# EAGLE board relay-set-d-decode (EAGLE 7.7.0)
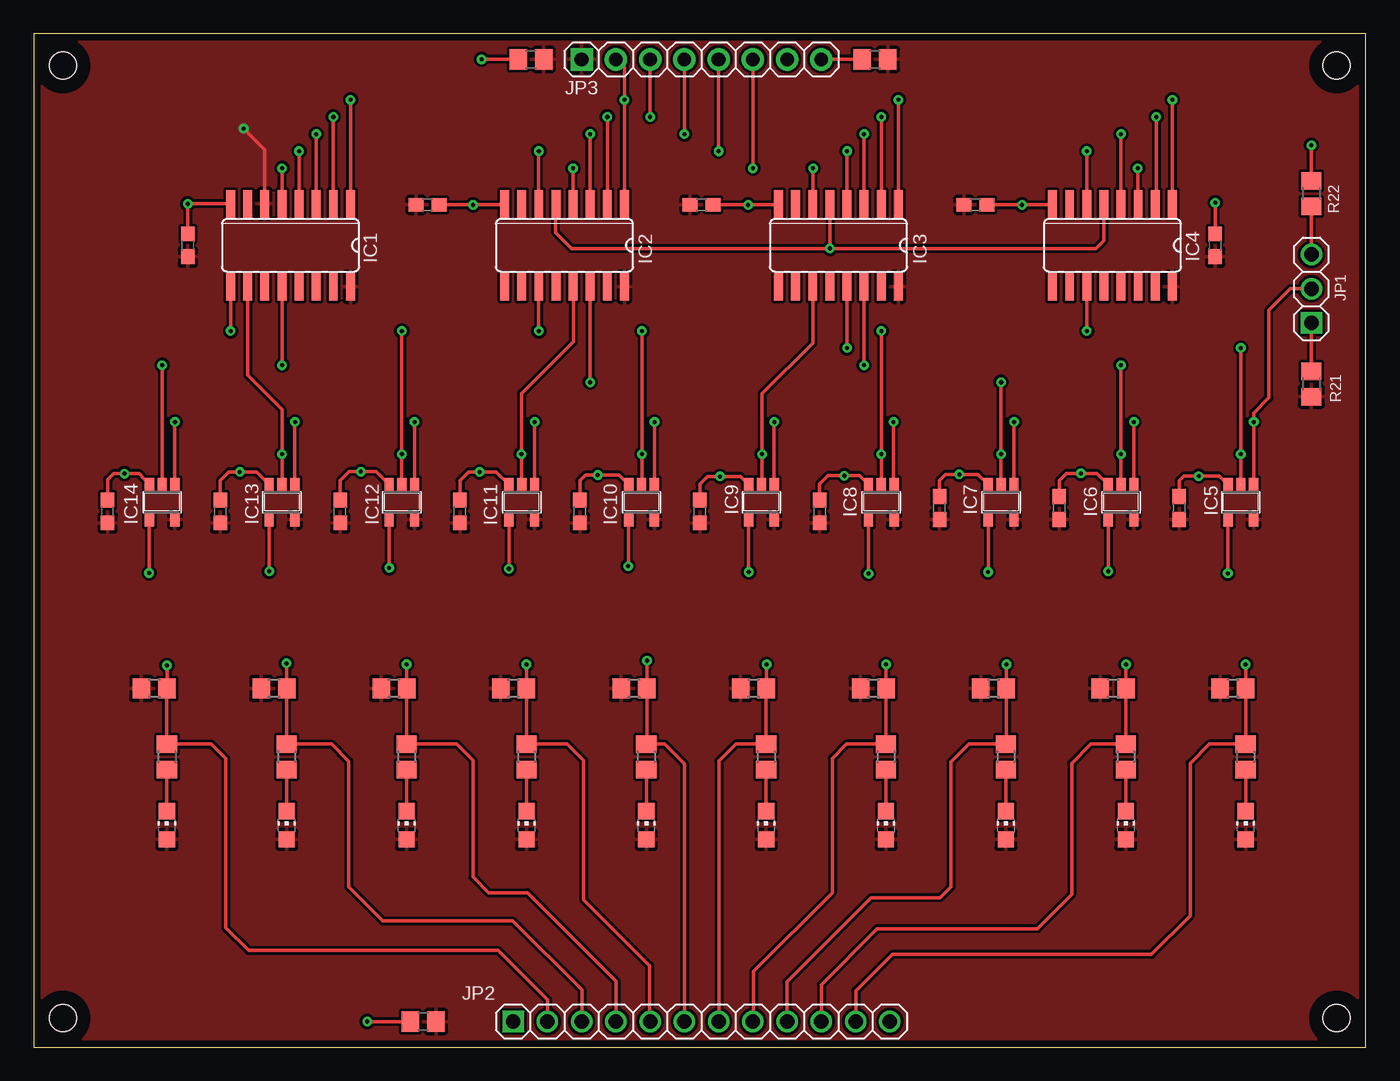
[diagram p0: board, top side]
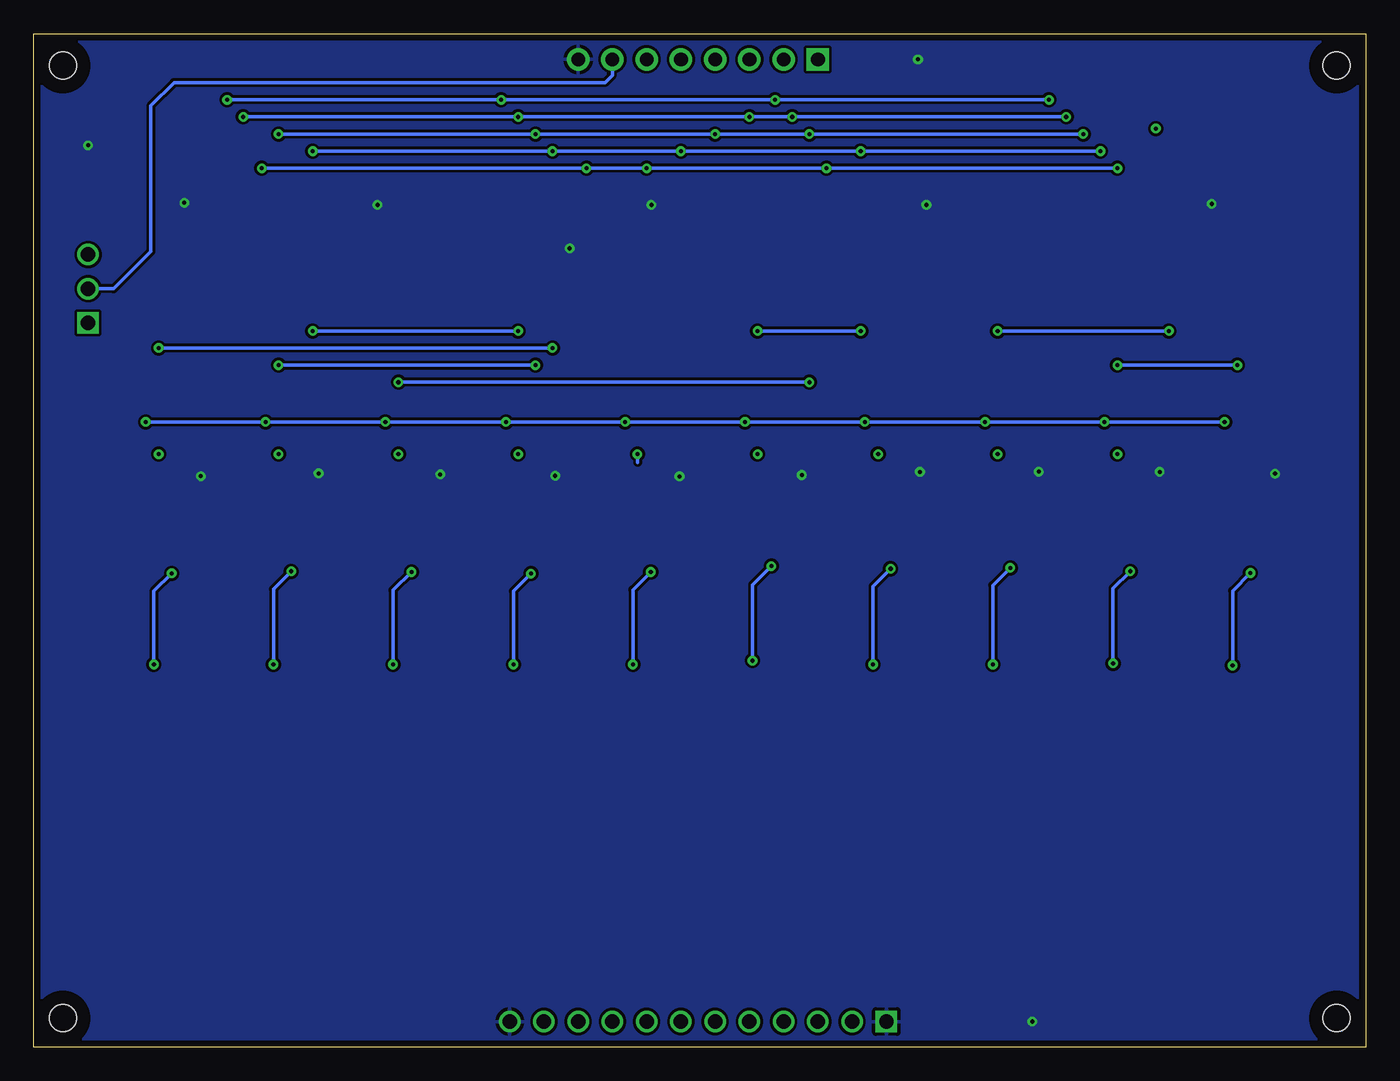
[diagram p1: board, bottom side, seen from below]

Size 98.81 x 75.18 mm. Coordinates in mm from the lower left corner, seen from the top.
Outline: 98.81,75.18 0,75.18 0,0 98.81,0 98.81,75.18
Copper layers (1*16): Top 0.035mm / dielectric 1.5mm / Bottom 0.035mm
Design rules "default *": minimum track width 8mil, minimum drill 12mil, track to track 8mil, track to pad 10mil, pad to pad 10mil, via to via 8mil, smd to smd 8mil, copper to edge 20mil, drill to drill 8mil, minimum pad ring 10mil, minimum via ring 8mil, stop-mask expansion 4mil, vias tented up to drill 0mil, thermal gap 10mil
Holes 2.01 mm at 2.16,2.16 96.65,2.16 96.65,72.82 2.16,72.82
tRestrict: area 94.6,0.2 to 98.7,4.2; area 94.6,70.8 to 98.7,74.8; area 0.2,70.8 to 4.2,74.8; area 0.2,0.2 to 4.2,4.2
bRestrict: area 94.6,0.2 to 98.7,4.2; area 94.6,70.8 to 98.7,74.8; area 0.2,70.8 to 4.2,74.8; area 0.2,0.2 to 4.2,4.2

## Footprints (pad centres in the part's own frame; a part is rotated, then mirrored left to right if it is on the bottom)
C0603 = smd 1.1 x 1: 1 -0.85,0; 2 0.85,0
C0805 = smd 1.3 x 1.5: 1 -0.95,0; 2 0.95,0
SO16 = smd 0.66 x 2.032: 1 -4.445,-3.073; 2 -3.175,-3.073; 3 -1.905,-3.073; 4 -0.635,-3.073; 5 0.635,-3.073; 6 1.905,-3.073; 7 3.175,-3.073; 8 4.445,-3.073; 9 4.445,3.073; 10 3.175,3.073; 11 1.905,3.073; 12 0.635,3.073; 13 -0.635,3.073; 14 -1.905,3.073; 15 -3.175,3.073; 16 -4.445,3.073
SOT23-5 = smd 0.69 x 0.99: 1 -0.95,-1.29; 2 0,-1.29; 3 0.95,-1.29; 4 0.95,1.3; 5 -0.95,1.3
1X03 = drill 1.067 square: 1 -2.54,0 | drill 1.067: 2 0,0; 3 2.54,0
1X12 = drill 1.067 square: 1 -13.97,0 | drill 1.067: 2 -11.43,0; 3 -8.89,0; 4 -6.35,0; 5 -3.81,0; 6 -1.27,0; 7 1.27,0; 8 3.81,0; 9 6.35,0; 10 8.89,0; 11 11.43,0; 12 13.97,0
1X08 = drill 1.016 pad 1.676 square: 1 -8.89,0 | drill 1.016 pad 1.676: 2 -6.35,0; 3 -3.81,0; 4 -1.27,0; 5 1.27,0; 6 3.81,0; 7 6.35,0; 8 8.89,0
CHIP-LED0805 = smd 1.2 x 1.2: A 0,-1.05; C 0,1.05
R0805 = smd 1.3 x 1.5: 1 -0.95,0; 2 0.95,0

## Placement (x,y rotation side)
C1  [C0603]  29.21,62.48 0 top
C2  [C0603]  87.63,59.49 90 top
C3  [C0603]  49.53,62.48 0 top
C4  [C0603]  69.85,62.48 0 top
C5  [C0805]  36.88,73.28 180 top
C6  [C0603]  49.4,39.75 90 top
C7  [C0805]  62.41,73.28 180 top
C8  [C0603]  58.29,39.75 90 top
C9  [C0805]  28.88,1.91 180 top
C10  [C0603]  67.18,40.01 90 top
C11  [C0603]  76.07,40.01 90 top
C12  [C0603]  5.49,39.75 90 top
C13  [C0603]  84.96,40.01 90 top
C14  [C0603]  13.84,39.75 90 top
C15  [C0603]  31.62,39.75 90 top
C16  [C0603]  22.73,39.75 90 top
C17  [C0603]  40.51,39.75 90 top
C18  [C0603]  11.43,59.49 90 top
IC1  74LS138D  [SO16]  19.05,59.49 180 top
IC2  74LS138D  [SO16]  39.37,59.49 180 top
IC3  74LS138D  [SO16]  59.69,59.49 180 top
IC4  74LS138D  [SO16]  80.01,59.49 180 top
IC5  74LVC1G125DBV  [SOT23-5]  89.53,40.44 180 top
IC6  74LVC1G125DBV  [SOT23-5]  80.64,40.44 180 top
IC7  74LVC1G125DBV  [SOT23-5]  71.75,40.44 180 top
IC8  74LVC1G125DBV  [SOT23-5]  62.87,40.44 180 top
IC9  74LVC1G125DBV  [SOT23-5]  53.98,40.44 180 top
IC10  74LVC1G125DBV  [SOT23-5]  45.09,40.44 180 top
IC11  74LVC1G125DBV  [SOT23-5]  36.2,40.44 180 top
IC12  74LVC1G125DBV  [SOT23-5]  27.3,40.44 180 top
IC13  74LVC1G125DBV  [SOT23-5]  18.41,40.44 180 top
IC14  74LVC1G125DBV  [SOT23-5]  9.53,40.44 180 top
JP1  [1X03]  94.77,56.26 90 top
JP2  [1X12]  49.53,1.91 0 top
JP3  [1X08]  49.53,73.28 0 top
LED1  [CHIP-LED0805]  89.89,16.46 0 top
LED2  [CHIP-LED0805]  81,16.46 0 top
LED3  [CHIP-LED0805]  72.11,16.46 0 top
LED4  [CHIP-LED0805]  63.22,16.46 0 top
LED5  [CHIP-LED0805]  54.33,16.46 0 top
LED6  [CHIP-LED0805]  45.44,16.46 0 top
LED7  [CHIP-LED0805]  36.55,16.46 0 top
LED8  [CHIP-LED0805]  27.66,16.46 0 top
LED9  [CHIP-LED0805]  18.77,16.46 0 top
LED10  [CHIP-LED0805]  9.88,16.46 0 top
R1  [R0805]  88.95,26.62 180 top
R2  [R0805]  80.06,26.62 180 top
R3  [R0805]  71.2,26.62 180 top
R4  [R0805]  62.28,26.62 180 top
R5  [R0805]  53.39,26.62 180 top
R6  [R0805]  44.53,26.62 180 top
R7  [R0805]  35.59,26.62 180 top
R8  [R0805]  26.72,26.62 180 top
R9  [R0805]  17.83,26.62 180 top
R10  [R0805]  8.94,26.62 180 top
R11  [R0805]  89.89,21.54 270 top
R12  [R0805]  81,21.54 270 top
R13  [R0805]  72.11,21.54 270 top
R14  [R0805]  63.22,21.54 270 top
R15  [R0805]  54.33,21.54 270 top
R16  [R0805]  45.44,21.54 270 top
R17  [R0805]  36.55,21.54 270 top
R18  [R0805]  27.66,21.54 270 top
R19  [R0805]  18.77,21.54 270 top
R20  [R0805]  9.88,21.54 270 top
R21  [R0805]  94.77,49.2 270 top
R22  [R0805]  94.77,63.32 270 top

## Library data of the parts
C1-C18 R1-R22 = resistor
IC1-IC4 = 74xx-us
IC5-IC14 = 74xx-little-us
JP1 JP3 = pinhead
JP2 = custom-pinhead
LED1-LED10 = led

## Nets
DA_IN: IC1.1 IC2.1 IC3.1 IC4.1 JP3.2
DB_IN: IC1.2 IC2.2 IC3.2 IC4.2 JP3.3
DC_IN: IC1.3 IC2.3 IC3.3 IC4.4 JP3.4
DD_IN: IC1.4 IC2.6 IC3.4 IC4.6 JP3.5
DE_IN: IC1.5 IC2.4 IC3.6 IC4.3 JP3.6
DSA-DSB: IC5.1 IC6.1 IC7.1 IC8.1 IC9.1 IC10.1 IC11.1 IC12.1 IC13.1 IC14.1 JP1.2 JP3.7
EIGHT: IC3.14 IC6.2
EIGHT_N: IC6.4 JP2.10 R2.1 R12.1
FIVE: IC3.11 IC9.2
FIVE_N: IC9.4 JP2.7 R5.1 R15.1
FOUR: IC2.11 IC10.2
FOUR_N: IC10.4 JP2.6 R6.1 R16.1
GND: C1.2 C2.2 C3.2 C4.2 C5.2 C6.2 C7.2 C8.2 C9.2 C10.2 C11.2 C12.2 C13.2 C14.2 C15.2 C16.2 C17.2 C18.2 IC1.8 IC2.5 IC2.8 IC3.5 IC3.8 IC4.5 IC4.8 IC5.3 IC6.3 IC7.3 IC8.3 IC9.3 IC10.3 IC11.3 IC12.3 IC13.3 IC14.3 JP2.1 JP2.12 JP3.8 R22.1
N$1: LED1.C R11.2
N$2: LED2.C R12.2
N$3: LED3.C R13.2
N$4: LED4.C R14.2
N$5: LED5.C R15.2
N$6: LED6.C R16.2
N$7: LED7.C R17.2
N$8: LED8.C R18.2
N$9: LED9.C R19.2
N$10: LED10.C R20.2
N$11: JP1.1 R21.1
N$13: JP1.3 R22.2
NINE: IC3.13 IC5.2
NINE_N: IC5.4 JP2.11 R1.1 R11.1
ONE: IC1.10 IC13.2
ONE_N: IC13.4 JP2.3 R9.1 R19.1
SEVEN: IC2.14 IC7.2
SEVEN_N: IC7.4 JP2.9 R3.1 R13.1
SIX: IC4.11 IC8.2
SIX_N: IC8.4 JP2.8 R4.1 R14.1
THREE: IC2.13 IC11.2
THREE_N: IC11.4 JP2.5 R7.1 R17.1
TWO: IC1.9 IC12.2
TWO_N: IC12.4 JP2.4 R8.1 R18.1
VCC: C1.1 C2.1 C3.1 C4.1 C5.1 C6.1 C7.1 C8.1 C9.1 C10.1 C11.1 C12.1 C13.1 C14.1 C15.1 C16.1 C17.1 C18.1 IC1.6 IC1.16 IC2.16 IC3.16 IC4.16 IC5.5 IC6.5 IC7.5 IC8.5 IC9.5 IC10.5 IC11.5 IC12.5 IC13.5 IC14.5 JP3.1 LED1.A LED2.A LED3.A LED4.A LED5.A LED6.A LED7.A LED8.A LED9.A LED10.A R1.2 R2.2 R3.2 R4.2 R5.2 R6.2 R7.2 R8.2 R9.2 R10.2 R21.2
ZERO: IC1.12 IC14.2
ZERO_N: IC14.4 JP2.2 R10.1 R20.1

## Tracks (layer width: path | path; a pad name or v marks a point on that pad's centre or on a via)
DA_IN  (via drill 0.3)
  Top 0.254: IC1.1 v23.5,70.28 | v84.45,70.28 IC4.1 | IC2.1 v43.81,70.28 43.81,72.64 JP3.2 | IC3.1 v64.14,70.28
  Bottom 0.254: v23.5,70.28 v43.81,70.28 v64.14,70.28 v84.45,70.28
DB_IN  (via drill 0.3)
  Top 0.254: IC1.2 v22.23,69.01 | v83.26,69.01 83.26,62.56 IC4.2 | IC2.2 v42.55,69.01 | IC3.2 v62.87,69.01 | JP3.3 v45.72,69.01
  Bottom 0.254: v22.23,69.01 v42.55,69.01 v45.72,69.01 v62.87,69.01 v83.26,69.01
DC_IN  (via drill 0.3)
  Top 0.254: IC1.3 v20.95,67.74 | IC3.3 v61.59,67.74 | JP3.4 v48.26,67.74 | IC4.4 v80.64,67.74 | IC2.3 v41.27,67.74
  Bottom 0.254: v20.95,67.74 v41.27,67.74 v48.26,67.74 v61.59,67.74 v80.64,67.74
DD_IN  (via drill 0.3)
  Top 0.254: IC1.4 v19.68,66.47 | IC2.6 v37.47,66.47 | JP3.5 v50.8,66.47 | IC4.6 v78.11,66.47 | IC3.4 v60.33,66.47
  Bottom 0.254: v19.68,66.47 v37.47,66.47 v50.8,66.47 v60.33,66.47 v78.11,66.47
DE_IN  (via drill 0.3)
  Top 0.254: IC1.5 v18.41,65.2 | IC2.4 v40.01,65.2 | IC3.6 57.78,65.18 v57.81,65.2 | JP3.6 v53.34,65.2 | IC4.3 81.89,62.59 v81.89,65.2
  Bottom 0.254: v18.41,65.2 v40.01,65.2 v53.34,65.2 v57.81,65.2 v81.89,65.2
DSA-DSB  (via drill 0.3)
  Top 0.254: IC14.1 v10.47,46.38 | 90.5,41.73 IC5.1 90.48,46.37 | IC13.1 19.36,46.38 v19.38,46.38 | IC12.1 28.25,46.38 v28.25,46.38 | IC11.1 37.15,46.38 v37.16,46.38 | IC10.1 46.03,46.37 v46.05,46.38 | IC9.1 54.92,46.37 v54.94,46.38 | IC8.1 63.78,41.76 v63.78,46.38 | IC7.1 72.7,46.38 v72.72,46.38 | IC6.1 81.59,46.38 v81.61,46.38 | 90.48,46.37 v90.5,46.38 | 90.48,46.37 90.48,47.05 91.62,48.18 91.62,54.69 93.19,56.26 JP1.2
  Bottom 0.254: v10.47,46.38 v19.38,46.38 v28.25,46.38 v37.16,46.38 v46.05,46.38 v54.94,46.38 v63.78,46.38 v72.72,46.38 v81.61,46.38 v90.5,46.38 | JP3.7 55.88,72.11 56.44,71.55 88.39,71.55 90.12,69.83 90.12,59.03 92.89,56.26 JP1.2
EIGHT  (via drill 0.3)
  Top 0.254: IC3.14 v61.59,50.6 | IC6.2 v80.64,43.99 v80.64,50.6
  Bottom 0.254: v80.64,50.6 v61.59,50.6
EIGHT_N  (via drill 0.3)
  Top 0.254: 81.54,22.5 R12.1 | IC6.4 79.69,35.32 v79.7,35.31 | v81.03,28.4 81.03,26.63 R2.1 R12.1 | R12.1 78.42,22.49 76.99,21.06 76.99,11.33 74.45,8.79 62.56,8.79 58.42,4.65 JP2.10
  Bottom 0.254: v79.7,35.31 81.03,33.98 v81.03,28.4
FIVE  (via drill 0.3)
  Top 0.254: IC9.2 54.03,41.78 v54.03,43.99 54.03,48.49 57.78,52.25 IC3.11 57.76,56.39
  Bottom 0.254: v54.03,43.99 54,43.38
FIVE_N  (via drill 0.3)
  Top 0.254: IC9.4 53.02,35.27 v53.03,35.26 | v54.36,28.4 54.36,26.63 R5.1 R15.1 52.08,22.49 50.83,21.23 50.83,1.93 JP2.7
  Bottom 0.254: v53.03,35.26 54.36,33.93 v54.36,28.4
FOUR  (via drill 0.3)
  Top 0.254: IC2.11 v37.47,53.14 | v45.11,53.14 v45.11,43.99 45.11,41.73 IC10.2
  Bottom 0.254: v37.47,53.14 v45.11,53.14
FOUR_N  (via drill 0.3)
  Top 0.254: v44.09,35.69 44.13,35.73 IC10.4 | v45.49,28.68 45.49,26.63 R6.1 45.48,22.52 R16.1 46.8,22.49 48.26,21.03 JP2.6
  Bottom 0.254: v44.09,35.69 45.49,34.29 v45.49,28.68
GND  (via drill 0.3, 0.3 pad 0.41)
  Top 0.254: IC13.3 16.52,42.67 v15.29,42.67 14.48,42.67 13.84,42.04 C14.2 | IC12.3 25.38,42.7 v24.26,42.7 23.39,42.7 22.73,42.04 C16.2 | IC14.3 7.83,42.55 v6.73,42.55 5.92,42.55 5.49,42.11 C12.2 | IC11.3 34.3,42.67 v33.07,42.67 32.26,42.67 31.62,42.04 C15.2 | IC10.3 43.42,42.44 v41.83,42.44 40.92,42.44 40.51,42.04 C17.2 | IC9.3 52.41,42.34 v50.9,42.34 49.96,42.34 49.4,41.78 C6.2 | IC8.3 61.25,42.39 v60.12,42.39 58.9,42.39 58.29,41.78 C8.2 | IC7.3 70.04,42.49 v68.66,42.49 67.64,42.49 67.18,42.04 C10.2 | IC6.3 78.85,42.57 v77.67,42.57 76.61,42.57 76.07,42.04 C11.2 | IC5.3 87.94,42.37 v86.41,42.37 85.29,42.37 84.96,42.04 C13.2 | IC4.5 79.38,59.84 78.79,59.26 v59.05,59.26 | v59.05,59.26 39.88,59.26 38.71,60.43 38.71,62.53 IC2.5 | IC3.5 v59.05,59.26 | IC1.8 v11.43,62.56 C18.2 | C1.2 v32.59,62.48 34.92,62.48 IC2.8 | C3.2 v52.98,62.48 55.24,62.48 IC3.8 | C4.2 v73.3,62.48 75.56,62.48 IC4.8 | C2.2 v87.63,62.64 | C5.2 v33.22,73.28 | C7.2 JP3.8 | C9.2 v24.74,1.91 | R22.1 v94.77,66.9
  Bottom 0.254: v68.66,42.49 68.56,42.6
  pour Bottom: 98.55,0.25 0.25,0.25 0.25,74.93 98.55,74.93
N$1
  Top 0.254: R11.2 LED1.C
N$2
  Top 0.254: R12.2 LED2.C
N$3
  Top 0.254: R13.2 LED3.C
N$4
  Top 0.254: R14.2 LED4.C
N$5
  Top 0.254: R15.2 LED5.C
N$6
  Top 0.254: R16.2 LED6.C
N$7
  Top 0.254: R17.2 LED7.C
N$8
  Top 0.254: R18.2 LED8.C
N$9
  Top 0.254: LED9.C R19.2
N$10
  Top 0.254: R20.2 LED10.C
N$11
  Top 0.254: JP1.1 R21.1
N$13
  Top 0.254: JP1.3 R22.2
NINE  (via drill 0.3)
  Top 0.254: IC3.13 v60.33,51.87 | v89.53,51.87 v89.53,43.99 IC5.2
  Bottom 0.254: v60.33,51.87 v89.53,51.87
NINE_N  (via drill 0.3)
  Top 0.254: IC5.4 88.58,35.17 v88.57,35.15 | v89.89,28.4 R1.1 R11.1 87.21,22.49 85.78,21.06 85.78,9.75 82.91,6.88 63.68,6.88 60.98,4.19 60.98,1.93 JP2.11
  Bottom 0.254: v88.57,35.15 89.89,33.83 v89.89,28.4
ONE  (via drill 0.3)
  Top 0.254: IC1.10 15.88,49.86 18.41,47.32 v18.41,43.99 IC13.2
ONE_N  (via drill 0.3 pad 0.41)
  Top 0.254: JP2.3 40.66,1.93 40.66,4.24 35.53,9.37 25.88,9.37 23.37,11.89 23.37,21.21 22.09,22.49 R19.1 R9.1 18.75,26.66 18.75,27.96 v18.75,28.47 | IC13.4 17.48,39.14 v17.48,35.31
  Bottom 0.254: v17.48,35.31 18.75,34.04 v18.75,28.47
SEVEN  (via drill 0.3)
  Top 0.254: IC2.14 v41.27,49.33 | v71.75,49.33 v71.75,43.99 IC7.2
  Bottom 0.254: v41.27,49.33 v71.75,49.33
SEVEN_N  (via drill 0.3)
  Top 0.254: v72.16,28.4 72.16,26.63 R3.1 72.15,22.52 R13.1 69.35,22.49 68.05,21.18 68.05,11.91 67.23,11.1 62.1,11.1 55.85,4.85 55.85,1.93 JP2.9 | IC7.4 70.81,35.27 v70.79,35.26
  Bottom 0.254: v72.16,28.4 72.16,33.91 72.13,33.91 v70.79,35.26
SIX  (via drill 0.3)
  Top 0.254: v62.87,53.14 v62.87,43.99 IC8.2 | IC4.11 v78.11,53.14
  Bottom 0.254: v78.11,53.14 v62.87,53.14
SIX_N  (via drill 0.3)
  Top 0.254: IC8.4 61.91,35.14 v61.92,35.13 | v63.22,28.4 R4.1 63.23,22.5 R14.1 60.28,22.49 59.23,21.44 59.23,11.46 53.39,5.61 53.39,1.96 JP2.8
  Bottom 0.254: v61.92,35.13 63.22,33.83 v63.22,28.4
THREE  (via drill 0.3)
  Top 0.254: 36.17,41.75 IC11.2 arc-90 36.17,41.75 | 36.17,41.75 v36.17,43.99 36.17,48.49 40.03,52.35 40.03,56.39 IC2.13
THREE_N  (via drill 0.3)
  Top 0.254: 36.55,26.63 R7.1 | 36.55,26.63 R17.1 39.56,22.49 40.79,21.26 40.79,10.95 45.7,6.04 45.7,1.93 JP2.5 | 36.55,26.63 v36.55,28.4 | IC11.4 v35.24,35.49
  Bottom 0.254: v36.55,28.4 36.55,34.19 v35.24,35.49
TWO  (via drill 0.3)
  Top 0.254: IC1.9 v14.61,53.14 | v27.3,53.14 v27.3,43.99 IC12.2
  Bottom 0.254: v14.61,53.14 v27.3,53.14
TWO_N  (via drill 0.3)
  Top 0.254: R8.1 R18.1 31.38,22.49 32.59,21.29 32.59,12.62 33.76,11.46 36.63,11.46 43.2,4.88 43.2,1.93 JP2.4 | R8.1 | R8.1 v27.66,28.4 | IC12.4 v26.36,35.56
  Bottom 0.254: v27.66,28.4 27.66,34.27 v26.36,35.56
VCC  (via drill 0.3)
  Top 0.254: IC1.6 17.14,66.57 v15.57,68.15
  pour Top (rank 2): 98.55,0.25 0.25,0.25 0.25,74.93 98.55,74.93
ZERO  (via drill 0.3)
  Top 0.254: IC1.12 v18.41,50.6 | v9.53,50.6 IC14.2
  Bottom 0.254: v18.41,50.6 v9.53,50.6
ZERO_N  (via drill 0.3 pad 0.41)
  Top 0.254: 9.86,26.66 R10.1 | JP2.2 38.12,1.93 38.12,3.5 34.44,7.19 15.93,7.19 14.25,8.87 14.25,21.41 13.17,22.49 R20.1 R10.1 | IC14.4 8.56,39.12 v8.56,35.18 | v9.88,28.32 v9.89,28.31 R10.1
  Bottom 0.254: v8.56,35.18 9.88,33.86 v9.88,28.32

## Text on the board
Document: 0 | 1 | 2 | 3 | 4 | 5 | 6 | 7 | 8 | 9 | Relay Set D / Decode